# Altium PCB PCB1.PcbDoc
Units mil, origin at the board's own origin, x right, y up, seen from the top; angles counter-clockwise.
Board outline 3680 x 3410 mil, 2 copper layers (Top Layer, Bottom Layer); 35 components, 22 nets, 114 pads, 11 vias.
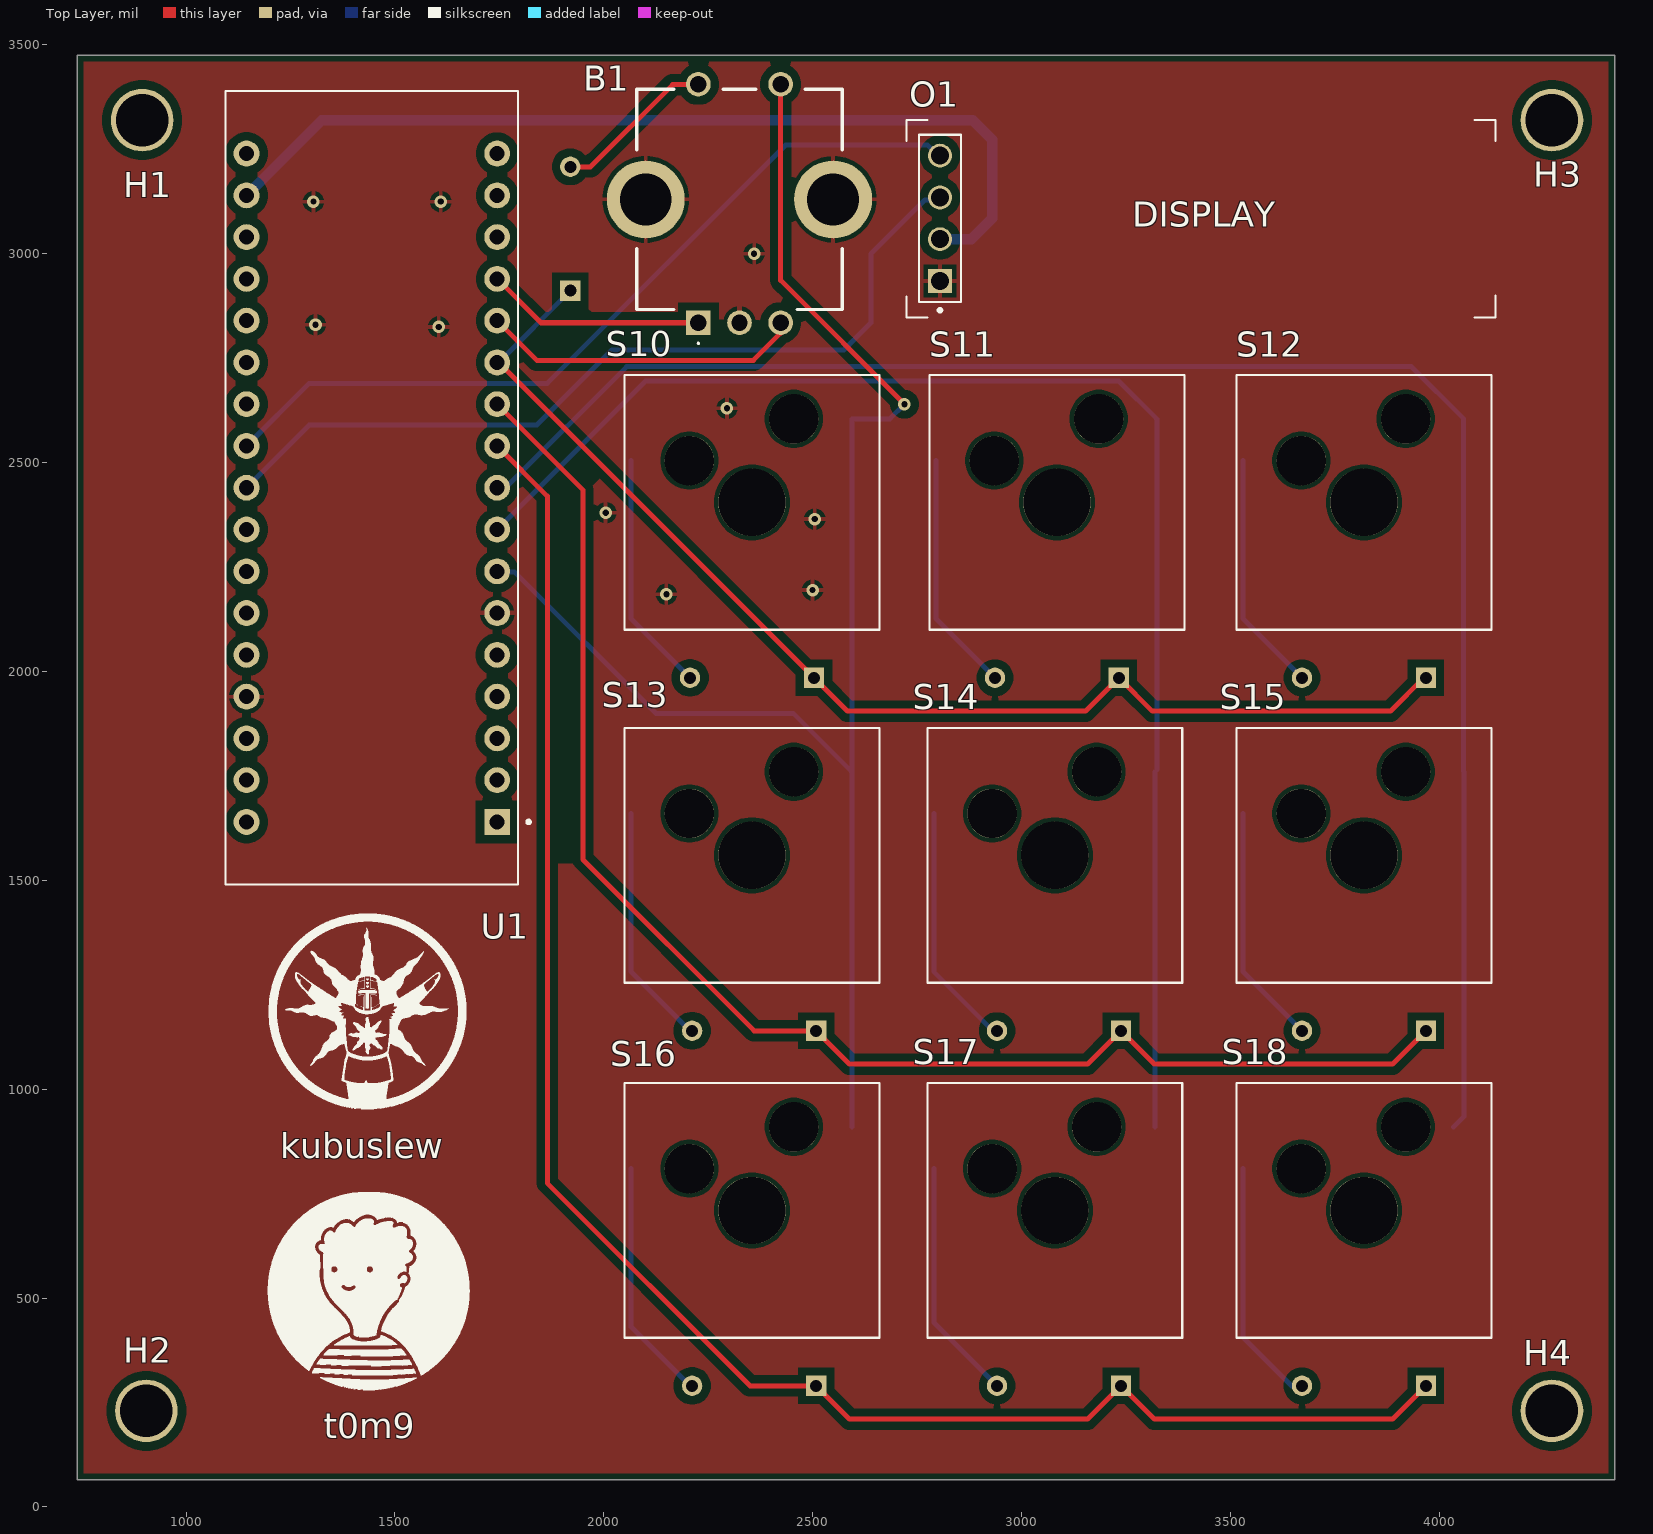
[diagram p0: Top Layer view]
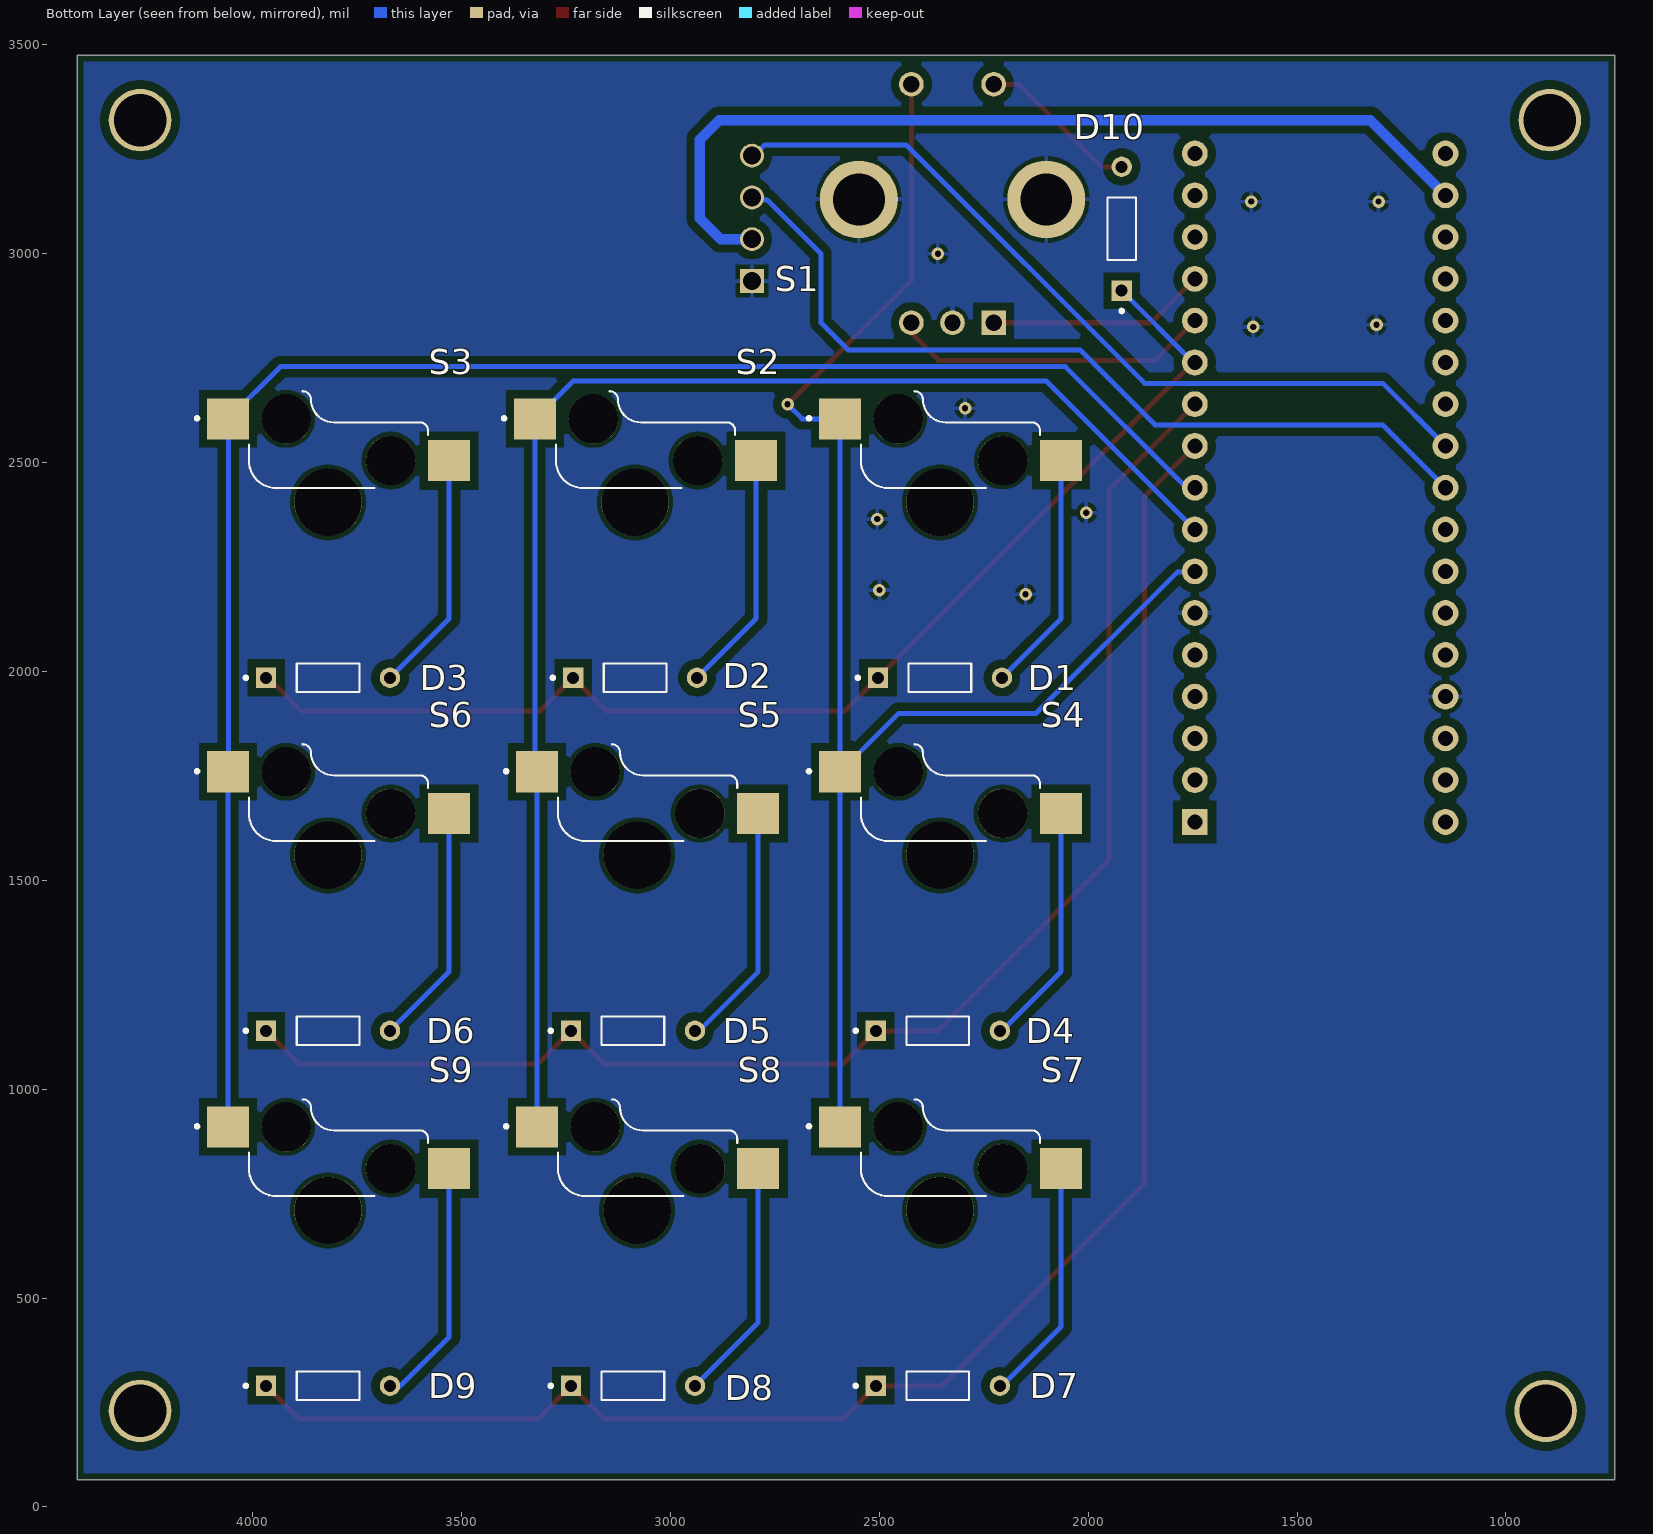
[diagram p1: Bottom Layer view, seen from below]
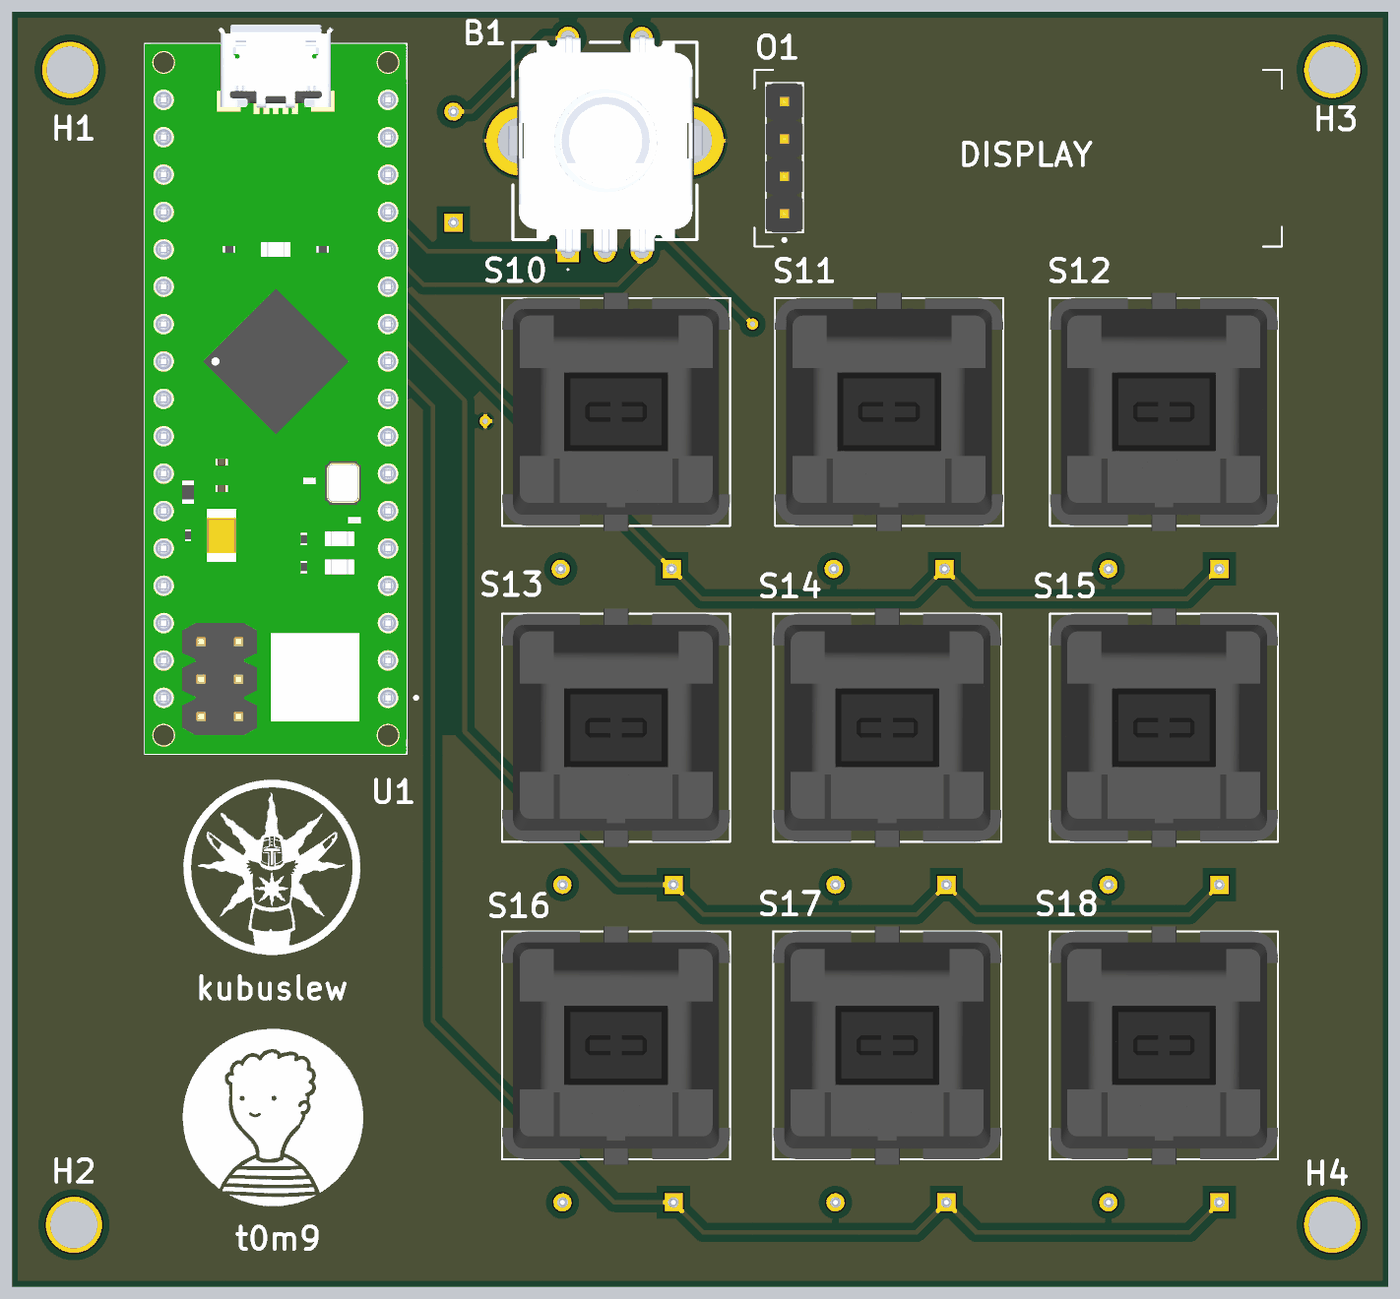
[diagram p2: 3D render of the assembled board from above, using the file's embedded part models]
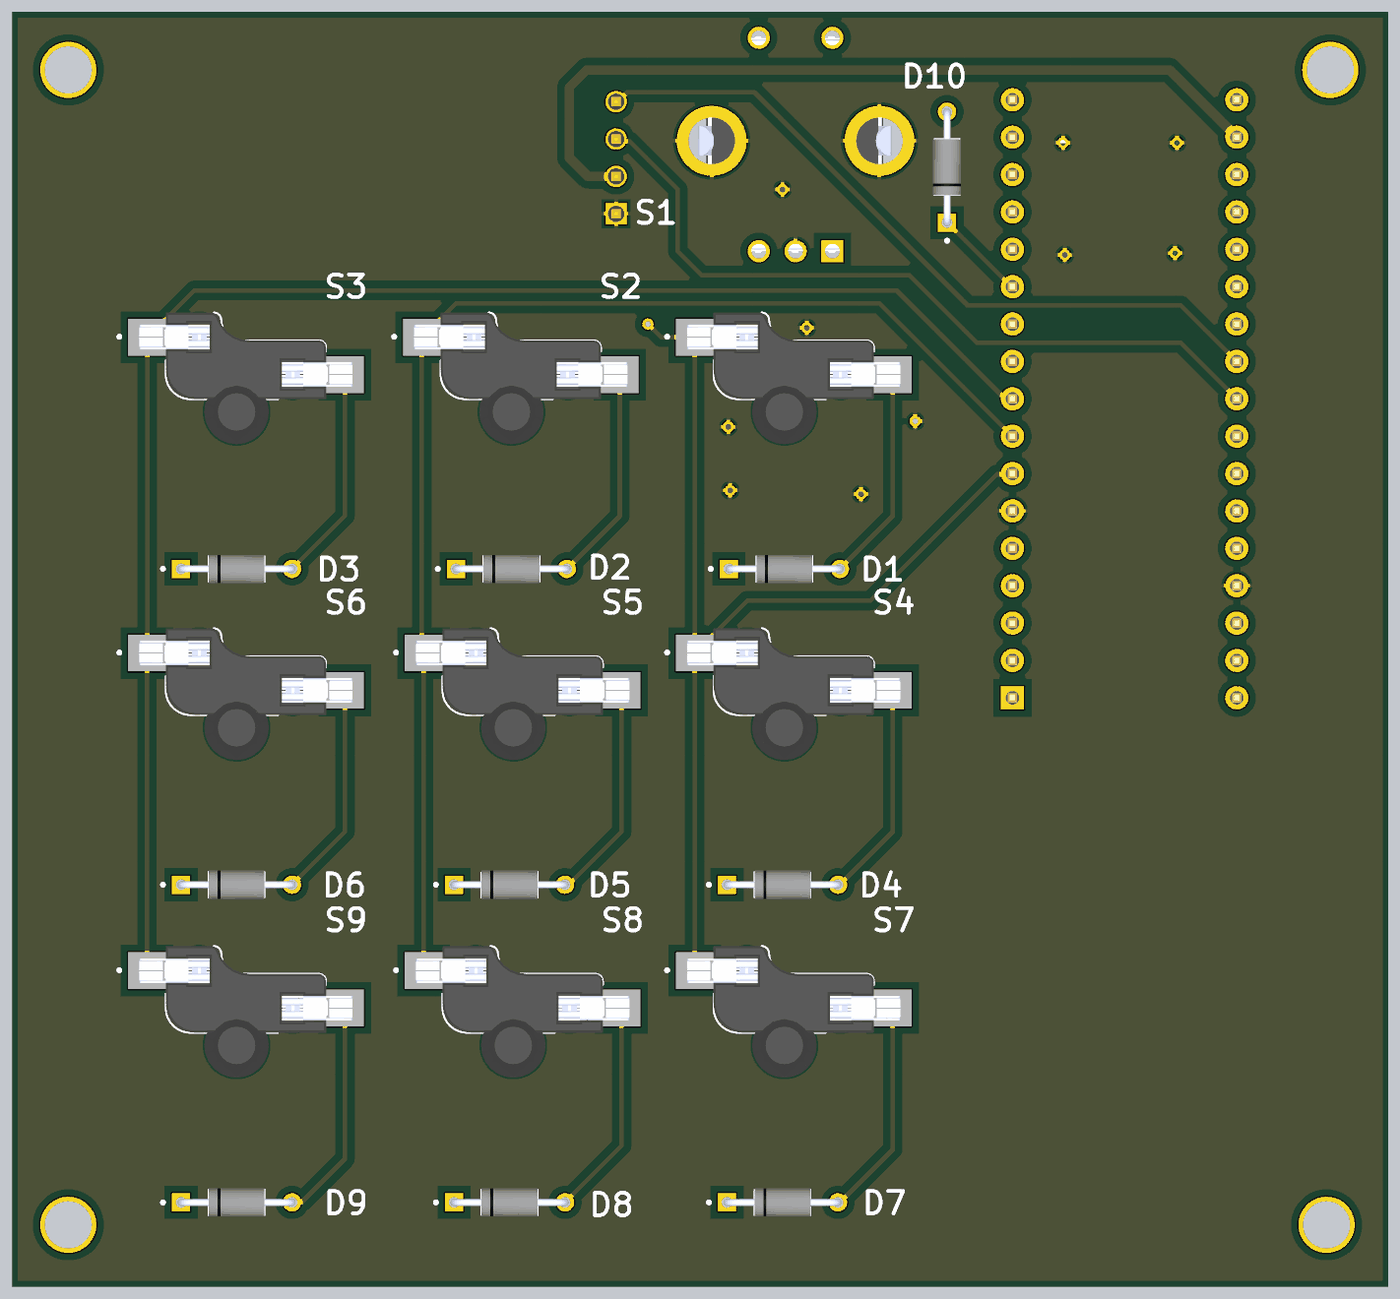
[diagram p3: 3D render of the assembled board from below, using the file's embedded part models]

## Layer stack, top to bottom
Top Solder: solder mask 0.4, Solder Resist, Dk 3.5
Top Layer: signal copper 1.4
Dielectric 1: dielectric 12.6, FR-4, Dk 4.8
Bottom Layer: signal copper 1.4
Bottom Solder: solder mask 0.4, Solder Resist, Dk 3.5

## Board outline
740,65 4420,65 4420,3475 740,3475

## Design rules (kind name [scope] priority, off if disabled: settings)
BoardOutlineClearance [All] p1: gap=10 ignorepadtopadclearanceinfootprint=FALSE except(0: Arc-SplitContinuation Track-SplitContinuation SMDPad-SplitContinuation THPad-SplitContinuation Via-SplitContinuation Fill-SplitContinuation Region-SplitContinuation Text-SplitContinuation; 15: Poly-OutlineEdge Poly-CavityEdge Poly-CutoutEdge Poly-SplitBarrior Poly-SplitContinuation)
Clearance [All] p1: gap=10 ignorepadtopadclearanceinfootprint=FALSE except(20: Arc-Poly Track-Poly SMDPad-Poly THPad-Poly Via-Poly Fill-Poly Poly-Poly)
HoleSize [All] p1: absolutevalues=TRUE maxlimit=400 minlimit=1 maxpercent=80.000 minpercent=20.000
PolygonConnect [All] p1: connectstyle=Relief reliefconductorwidth=10 reliefentries=4 polygonreliefangle="90 Angle" airgapwidth=10
RoutingVias [All] p1: holewidth=28 width=50 viastyle="Through Hole" minholewidth=10 minwidth=20 maxholewidth=200 maxwidth=400
SolderMaskExpansion [All] p1: expansion=4 istentingtop=FALSE
SupplyNets "Schematic Supply Nets" [InNet('GND')] p1: voltage=0.000
Width [All] p1: maxlimit=100 minlimit=10 preferedwidth=12 minimp=50.000000 maximp=50.000000 favimp=50.000000
29 further rules are at their usual default settings.

## Components (designator, comment, footprint, x,y, rotation, side; value= is the part's Value field where it differs from the comment)
B1 "PEC11R-4325F-S0012" PEC11R-4315F-S0012 2226.57,2835 r0 top
D1 "1N4148" "1N4148 Diode" 2355,1985 r180 bottom
D2 "1N4148" "1N4148 Diode" 3085,1985 r180 bottom
D3 "1N4148" "1N4148 Diode" 3820,1985 r180 bottom
D4 "1N4148" "1N4148 Diode" 2360,1140 r180 bottom
D5 "1N4148" "1N4148 Diode" 3090,1140 r180 bottom
D6 "1N4148" "1N4148 Diode" 3820,1140 r180 bottom
D7 "1N4148" "1N4148 Diode" 2360,290 r180 bottom
D8 "1N4148" "1N4148 Diode" 3090,290 r180 bottom
D9 "1N4148" "1N4148 Diode" 3820,290 r180 bottom
D10 "1N4148" "1N4148 Diode" 1920,3060 r90 bottom
H1 "Tooling Hole" "Tooling Hole" 895,3320 r0 top
H2 "Tooling Hole" "Tooling Hole" 905,230 r0 top
H3 "Tooling Hole" "Tooling Hole" 4270,3320 r0 top
H4 "Tooling Hole" "Tooling Hole" 4270,230 r0 top
O1 "WINSTAR OLED Display" "WINSTAR OLED DISPLAY" 2955,3095 r0 top
S1 "PG151101S11" SW_PG151101S11 2330,2555 r180 bottom
S2 "PG151101S11" SW_PG151101S11 3060,2555 r180 bottom
S3 "PG151101S11" SW_PG151101S11 3795,2555 r180 bottom
S4 "PG151101S11" SW_PG151101S11 2330,1710 r180 bottom
S5 "PG151101S11" SW_PG151101S11 3055,1710 r180 bottom
S6 "PG151101S11" SW_PG151101S11 3795,1710 r180 bottom
S7 "PG151101S11" SW_PG151101S11 2330,860 r180 bottom
S8 "PG151101S11" SW_PG151101S11 3055,860 r180 bottom
S9 "PG151101S11" SW_PG151101S11 3795,860 r180 bottom
S10 "MX1A-11NN" SW_MX1A-11NN 2355,2405 r0 top
S11 "MX1A-11NN" SW_MX1A-11NN 3085,2405 r0 top
S12 "MX1A-11NN" SW_MX1A-11NN 3820,2405 r0 top
S13 "MX1A-11NN" SW_MX1A-11NN 2355,1560 r0 top
S14 "MX1A-11NN" SW_MX1A-11NN 3080,1560 r0 top
S15 "MX1A-11NN" SW_MX1A-11NN 3820,1560 r0 top
S16 "MX1A-11NN" SW_MX1A-11NN 2355,710 r0 top
S17 "MX1A-11NN" SW_MX1A-11NN 3080,710 r0 top
S18 "MX1A-11NN" SW_MX1A-11NN 3820,710 r0 top
U1 "Arduino Micro" "Arduino Micro" 1445,2440 r180 top

## Footprints (in the part's own frame and the unit in brackets; to place one, negate y for a bottom-side part, rotate by r counter-clockwise, add the part's x,y. Pads: shape width x height; smd on the part's side, far side on the other; paste and mask are expansions set on the pad)
"1N4148 Diode" [mm]
  round 1.238 hole 0.73: A(3.768,0)
  rect 1.238x1.238 / inner round 1.238 / far side rect 1.238x1.238 hole 0.73: K(-3.768,0)
  silkscreen extent -5.1,-0.86 1.9,0.86, body extent -4,-0.95 4,0.96, height 1.9
"Arduino Micro" [mil]
  rect 62x62 / inner round 62 / far side rect 62x62 hole 36: 1(-300,800)
  round 62 hole 36: 2(-300,700) 3(-300,600) 4(-300,500) 5(-300,400) 6(-300,300) 7(-300,200) 8(-300,100) 9(-300,0) 10(-300,-100) 11(-300,-200) 12(-300,-300) 13(-300,-400) 14(-300,-500) 15(-300,-600) 16(-300,-700) 17(-300,-800) 18(300,-800) 19(300,-700) 20(300,-600) 21(300,-500) 22(300,-400) 23(300,-300) 24(300,-200) 25(300,-100) 26(300,0) 27(300,100) 28(300,200) 29(300,300) 30(300,400) 31(300,500) 32(300,600) 33(300,700) 34(300,800)
  silkscreen extent -379,-950 350,950, body extent -350,-1002 350,950, height 470
PEC11R-4315F-S0012 [mm]
  round 1.5 hole 1: 1(0,14.5) 2(5,14.5) B1(5,0) C1(2.5,0)
  round 4.74 hole 3.16: 3(-3.2,7.5) 4(8.2,7.5)
  rect 1.5x1.5 hole 1: A1(0,0)
  silkscreen extent -3.75,-1.3 8.75,14.2, body extent -4.05,-0.13 9.14,14.62, height 24.5
SW_MX1A-11NN [mil]
  round 161 hole 161 unplated: ""(0,0)
  silkscreen extent -305,-305 305,305, body extent -305,-319 305,319, height 600
SW_PG151101S11 [mm]
  rect 2.55x2.5 smd: 1(-6.725,1.27) 2(6.725,-1.27)
  round 3 hole 3 unplated: ""(-3.175,1.27) ""(3.175,-1.27)
  silkscreen extent -8.7,-2.95 5.45,2.94, body extent -7.25,-2.95 7.25,2.95, height 1.85
"Tooling Hole" [mm]
  round 3.81 hole 3.2: 10(0,0)
"WINSTAR OLED DISPLAY" [mm] "WEA012832FWPP3N00000"
  rect 1.45x1.45 / inner round 1.45 / far side rect 1.45x1.45 hole 1.1: 1(-3.81,-4.064)
  round 1.45 hole 1.1: 2(-3.81,-1.524) 3(-3.81,1.016) 4(-3.81,3.556)
  silkscreen extent -5.84,-6.29 29.97,5.71, body extent -5.08,-5.33 -2.54,4.83, height 5.57

## Part data
B1: library part PEC11R-4315F-S0012, "Rotary Encoder Mechanical 12 Quadrature (Incremental) Vertical", Manufacturer_Name=Bourns, Mouser Part Number=652-PEC11R4325FS0012, Datasheet Link=https://www.bourns.com/docs/product-datasheets/pec11r.pdf, Geometry.Height=31.5mm, Manufacturer_Part_Number=PEC11R-4325F-S0012, Mouser Price/Stock=https://www.mouser.co.uk/ProductDetail/Bourns/PEC11R-4325F-S0012?qs=Zq5ylnUbLm4xKJFZnkQTMQ%3D%3D
D1 D2 D3 D4 D5 D6 D7 D8 D9 D10: "Diode Standard 75V 200mA Surface Mount SOD-523F", Package="AXIAL LEAD-2 ON Semiconductor", Check_prices=https://www.snapeda.com/parts/1N4148/Onsemi/view-part/?ref=eda, MF="ON Semiconductor", MP=1N4148, SnapEDA_Link=https://www.snapeda.com/parts/1N4148/Onsemi/view-part/?ref=snap
O1: "WEA012832FWPP3N00000", ComponentLink1Description="New link", ComponentLink1URL=https://www.soselectronic.com/pl-pl/products/winstar/wea012832fwpp3n00000-401631
S1 S2 S3 S4 S5 S6 S7 S8 S9: Package=Package, Check_prices=https://www.snapeda.com/parts/PG151101S11/Kailh/view-part/?ref=eda, MF=Kailh, MP=PG151101S11, SnapEDA_Link=https://www.snapeda.com/parts/PG151101S11/Kailh/view-part/?ref=snap
S10 S11 S12 S13 S14 S15 S16 S17 S18: "Switch,Key,SPST-NO,Keyboard,Low Profile,10mA,12VDC,Face Place Mount,Std Force", Package=None, Check_prices=https://www.snapeda.com/parts/MX1A-11NN/Cherry/view-part/?ref=eda, MF=Cherry, MP=MX1A-11NN, SnapEDA_Link=https://www.snapeda.com/parts/MX1A-11NN/Cherry/view-part/?ref=snap
U1: "Microcontroller board based on the ATmega32u4", Package="Non-Standard Arduino", Check_prices=https://www.snapeda.com/parts/Arduino%20Micro/Arduino/view-part/?ref=eda, MF=Arduino, MP="Arduino Micro", SnapEDA_Link=https://www.snapeda.com/parts/Arduino%20Micro/Arduino/view-part/?ref=snap

## Via types
v1: diameter 30, hole 15, Top Layer to Bottom Layer, 11 vias

## Nets (pads, with @x,y where several pads share a name; then routed paths per layer and width w, separated by ;. In a path a pad name is that pad's centre, name@x,y a point inside that pad or via, vN(x,y) a via of type N, cw(c..) or ccw(c..) an arc to the next point about the centre after c; other vN are vias at no path point)
COL_0: B1.2 S1.1 S4.1 S7.1 U1.7 | length 3772
  Top Layer w12: B1.2 2423.43,2936.57 v1(2720,2640)
  Bottom Layer w12: U1.7 1746.97,2238.03 1786.97,2238.03 2125,1900 2453.78,1900 2593.78,1760 S4.1 ; S7.1 S4.1 ; v1(2720,2640) 2685,2605 S1.1 S4.1
COL_1: S2.1 S5.1 S8.1 U1.8 | length 3461.2
  Bottom Layer w12: U1.8 2100,2695 3233.78,2695 3323.78,2605 S2.1 3324.76,1765 S5.1 S8.1
COL_2: S3.1 S6.1 S9.1 U1.9 | length 4191.4
  Bottom Layer w12: U1.9 1754.57,2449.57 1774.57,2449.57 2055,2730 3933.78,2730 4058.78,2605 4058.78,1760.98 S6.1 4059.76,935 S9.1@4034.76,910
GND: B1.3 B1.4 B1.C1 O1.1 U1.6 U1.31
  other v1: 2150,2185 2500,2195 2505,2365 2005,2380 2295,2630 1605,2825 1310,2830 2360,3000 1305,3125 1610,3125
NetB1_1: B1.1 D10.A | length 382
  Top Layer w12: D10.A 1968.37,3208.37 2165,3405 B1.1@2220.59,3405
NetD1_A: D1.A S1.2 | length 578.6
  Bottom Layer w12: S1.2 2065.24,2126.4 D1.A
NetD2_A: D2.A S2.2 | length 578.6
  Bottom Layer w12: S2.2 2795.24,2126.4 D2.A
NetD3_A: D3.A S3.2 | length 578.6
  Bottom Layer w12: S3.2 3530.24,2126.4 D3.A
NetD4_A: D4.A S4.2 | length 578.6
  Bottom Layer w12: S4.2 2065.24,1281.4 D4.A@2206.63,1140
NetD5_A: D5.A S5.2 | length 578.6
  Bottom Layer w12: S5.2 2790.24,1281.4 D5.A@2931.63,1140
NetD6_A: D6.A S6.2 | length 578.6
  Bottom Layer w12: S6.2 3530.24,1281.4 D6.A
NetD7_A: D7.A S7.2 | length 578.6
  Bottom Layer w12: S7.2 2065.24,431.4 D7.A@2206.63,290
NetD8_A: D8.A S8.2 | length 582.7
  Bottom Layer w12: S8.2 2790.24,441.4 D8.A
NetD9_A: D9.A S9.2 | length 568.2
  Bottom Layer w12: S9.2 3530.24,406.4 3646.63,290
ROT_0: B1.B1 U1.13 | length 744
  Top Layer w12: U1.13 1840,2745 2358.11,2745 B1.B1@2422.83,2809.72
ROT_1: B1.A1 U1.14 | length 525.1
  Top Layer w12: U1.14 1850,2835 B1.A1
ROW_0: D1.K D2.K D3.K D10.K U1.12 | length 2909.7
  Top Layer w12: U1.12 1748.37,2740 D1.K 2583.37,1905 3153.37,1905 D2.K 3313.37,1905 3883.37,1905 D3.K@3963.37,1985
  Bottom Layer w12: U1.12 1748.37,2740 D10.K
ROW_1: D4.K D5.K D6.K U1.11 | length 3495.7
  Top Layer w12: U1.11 1950,2435 1950,1550 2360,1140 D4.K 2588.37,1060 3158.37,1060 D5.K 3318.37,1060 3888.37,1060 D6.K
ROW_2: D7.K D8.K D9.K U1.10 | length 4251.5
  Top Layer w12: U1.10 1865,2420 1865,775 2350,290 D7.K 2588.37,210 3158.37,210 D8.K 3318.37,210 3888.37,210 D9.K
SCL: O1.3 U1.26 | length 2044.5
  Bottom Layer w12: U1.26 1295,2590 1840,2590 2020,2770 2575,2770 2640,2835 2640,3000 2769.09,3129.09 2799.09,3129.09 O1.3
SDA: O1.4 U1.25 | length 1968.6
  Bottom Layer w12: U1.25 1295,2690 1865,2690 2435,3260 2775.43,3260 2800.43,3235 O1.4
VIN: O1.2 U1.19 | length 2213.1
  Bottom Layer w25: U1.19 1325,3320 2883.61,3320 2930,3273.61 2930,3085 2880,3035 O1.2
pads on no net: H1.10 H2.10 H3.10 H4.10 S1. S2. S3. S4. S5. S6. S7. S8. S9. S10. S11. S12. S13. S14. S15. S16. S17. S18. U1.1 U1.2 U1.3 U1.4 U1.5 U1.15 U1.16 U1.17 U1.18 U1.20 U1.21 U1.22 U1.23 U1.24 U1.27 U1.28 U1.29 U1.30 U1.32 U1.33 U1.34

## Polygon pours and split planes (outlines as drawn)
GND on Bottom Layer "NONET_L-01_P-001" (solid, pour order 1): 740,65 740,3475 4420,3475 4420,65
GND on Top Layer "NONET_L-01_P-001" (solid, pour order 0): 740,70 740,3475 4420,3475 4420,70

## Other copper
Top Layer:
  pour cut-out: 1885.12,1539.31 1886.24,1540.43 1938.49,1540.43 1938.49,2421.51 1800,2560 1785,2545 1785,2520 1880,2425
  pour cut-out: 1967.98,2439.23 1993.71,2464.96 1995.04,2464.96 1805,2655 1785,2635 1785,2620 1820,2585
  pour cut-out: 1783.52,2836.3 1849.06,2770.76 1849.06,2759.45 2351.17,2759.45 2394.86,2803.14 2394.86,2818.75 2375.75,2837.86 2370.68,2832.79 2280.94,2832.79 2278.21,2830.06 2238.42,2830.06 2212.67,2804.31 2200.18,2816.8 1844.77,2816.8 1813.95,2847.62 1783.52,2847.62 1781.96,2849.18
Bottom Layer:
  pour cut-out: 2815,3290 2815,3065 2820,3060 2880,3060 2925,3105 2925,3290 2855,3290 2840,3305
  pour cut-out: 1785,2670 1795,2660 1795,2610 1840,2610 1885,2655 1885,2660 1870,2675
  pour cut-out: 1700,2675 1300,2675 1300,2665 1185,2550 1200,2535 1200,2525 1205,2525 1290,2610 1705,2610

## Silkscreen, mask and mechanical layers (free items; w line width, h text height)
Top Overlay:
  drawing of 13 lines, arcs and shapes, not listed
  text "kubuslew" at 1225,835 h60
  text "t0m9" at 1330,165 h60

## Text inside footprints (layer, text, board x,y; h text height)
O1: Top Overlay "DISPLAY" at 3265,3065 h60